# Altium PCB LED Controller.PcbDoc
Units mil, origin at the board's own origin, x right, y up, seen from the top; angles counter-clockwise.
Board outline 1800 x 1050 mil, 2 copper layers (Top Layer, Bottom Layer), stack 62.8 mil thick; 21 components, 12 nets, 58 pads, 18 vias.
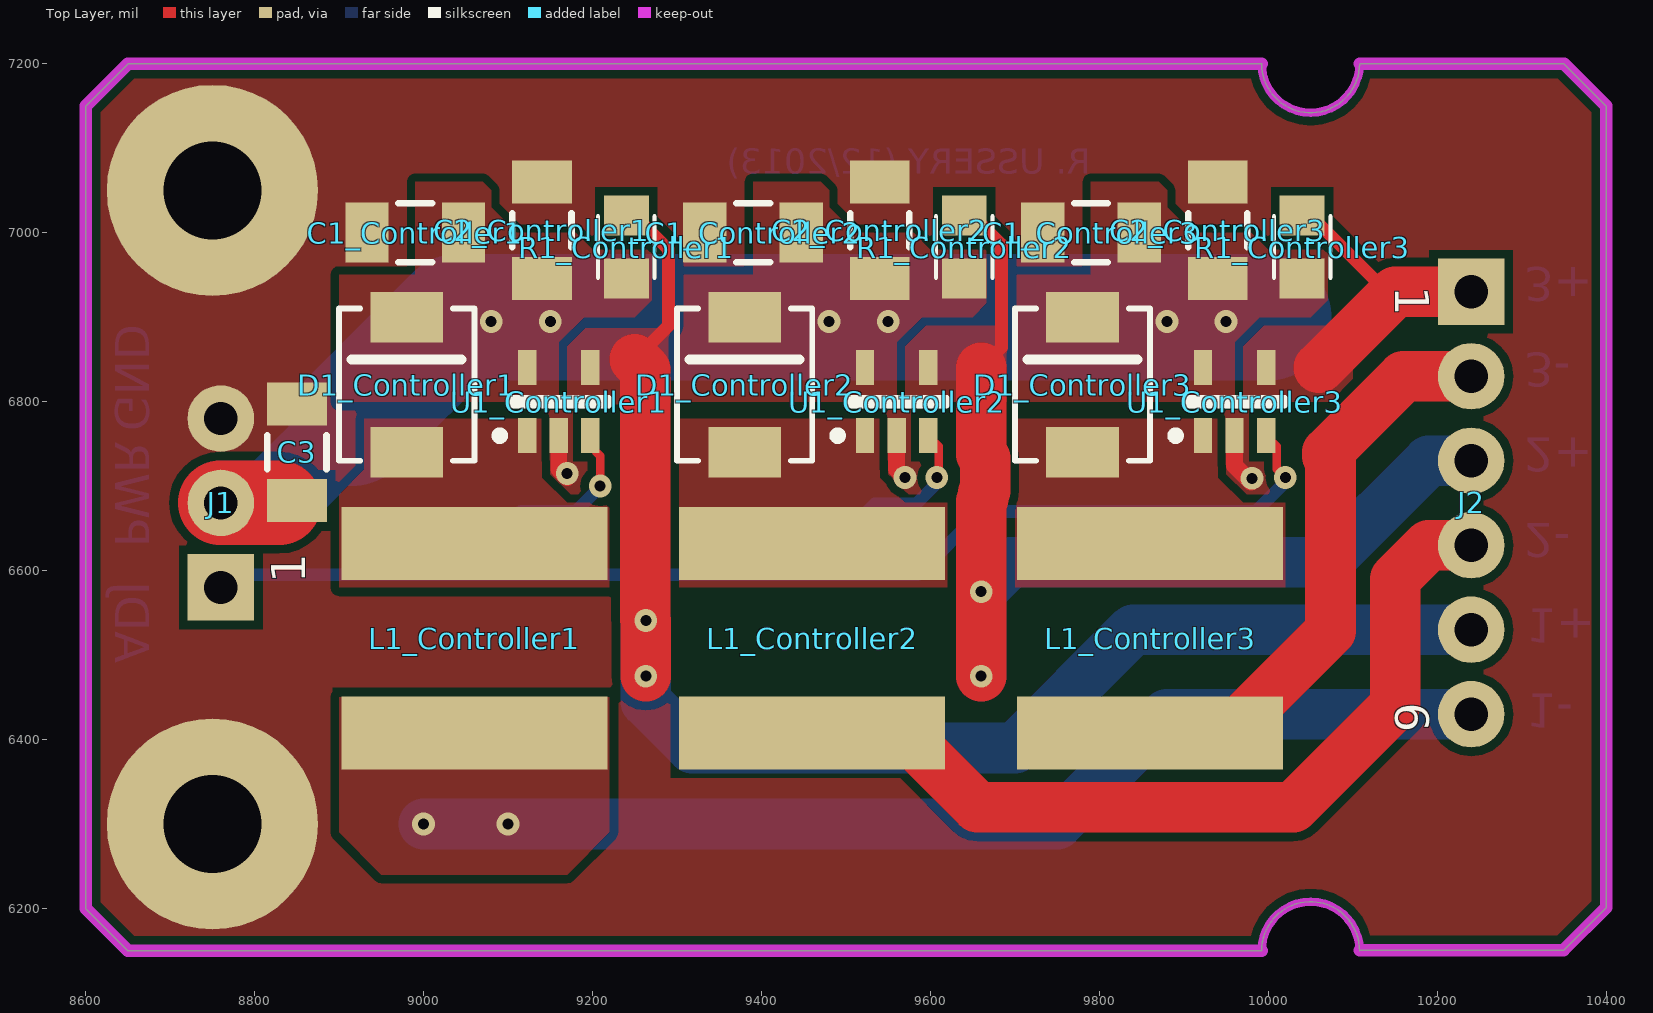
[diagram p0: Top Layer view]
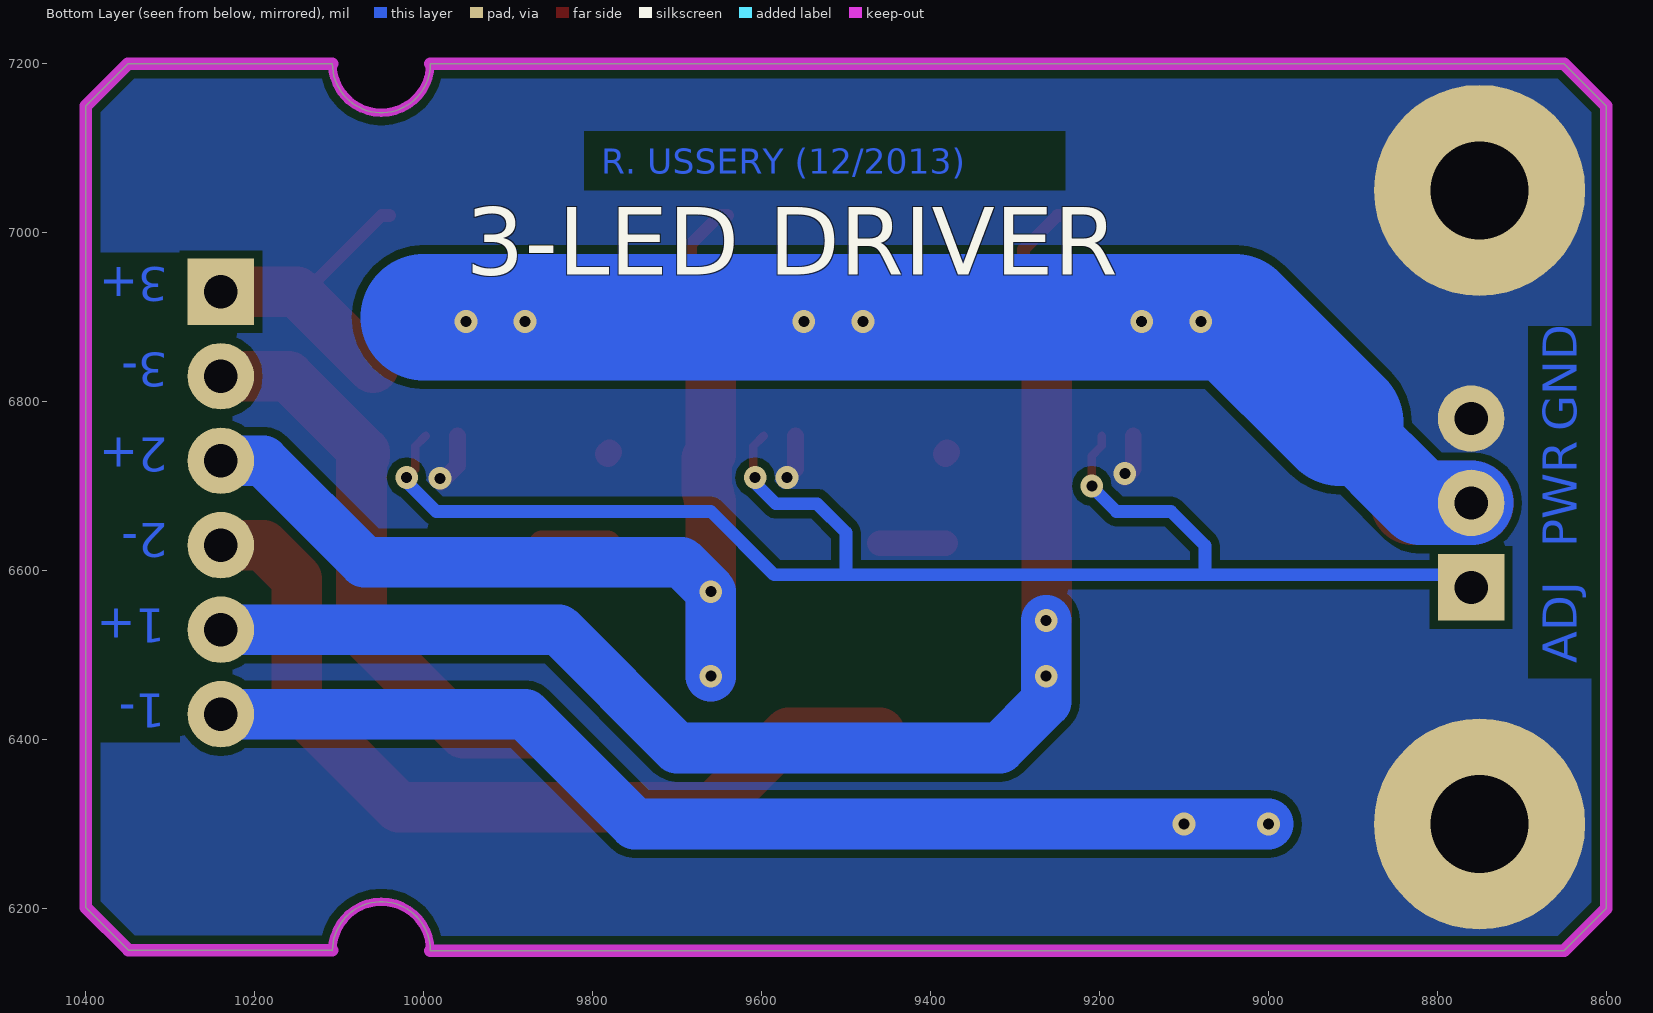
[diagram p1: Bottom Layer view, seen from below]
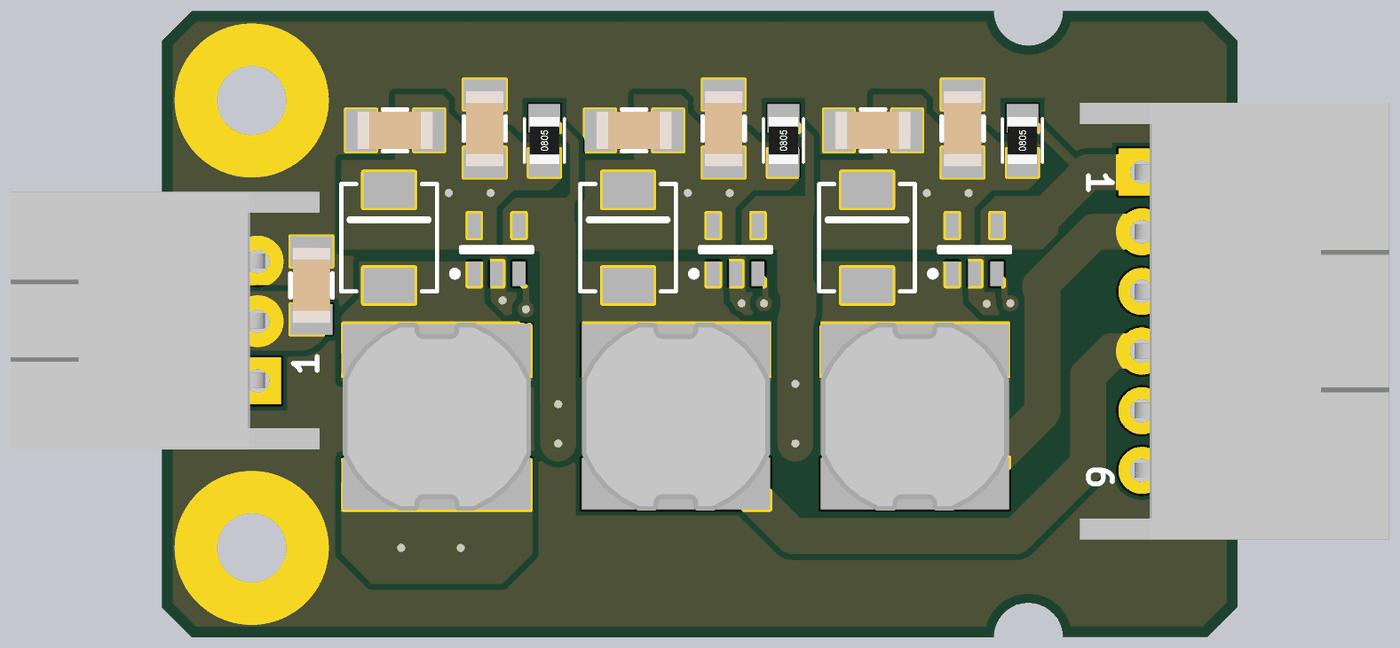
[diagram p2: 3D render of the assembled board from above, using the file's embedded part models]

## Layer stack, top to bottom
Top Layer: signal copper 1.4
Dielectric: core 60, FR-4, Dk 4.8
Bottom Layer: signal copper 1.4

## Board outline
8600,6200 8600,7150 8650,7200 9992,7200 ccw(c10050,7200) 10108,7200 10350,7200 10400,7150 10400,6201.25 10349.38,6150.62 10108,6150.62 10108,6150 ccw(c10050,6150) 9992,6150 8650,6150

## Design rules (kind name [scope] priority, off if disabled: settings)
AcuteAngle [All] p1: minimum=6.00000000000000E+0001 checktracksonly=FALSE
Clearance Clearance_1 [All] p1: gap=10
Clearance [All vs OnLayer('Mechanical 2')] p2: gap=15
HoleSize [All] p1: absolutevalues=TRUE maxlimit=200 minlimit=13 maxpercent=80.000 minpercent=20.000
MinimumAnnularRing [All] p1: minimumring=7
MinimumSolderMaskSliver [All] p1: minsoldermaskwidth=6
PolygonConnect [All] p1: connectstyle=Direct reliefconductorwidth=10 reliefentries=4 polygonreliefangle="90 Angle" airgapwidth=10
RoomDefinition Controller3 [InComponentClass('Controller3')] p1: confinementstyle=ConfineIn formatcopy=TRUE lockcomponents=FALSE outline 9680,7102.91 9680,6300 10100,6300 10100,7102.91
RoomDefinition Controller2 [InComponentClass('Controller2')] p2: confinementstyle=ConfineIn formatcopy=TRUE lockcomponents=FALSE outline 9280,7102.91 9280,6300 9700,6300 9700,7102.91
RoomDefinition Controller1 [InComponentClass('Controller1')] p3: confinementstyle=ConfineIn formatcopy=TRUE lockcomponents=FALSE outline 8880,7102.91 8880,6300 9300,6300 9300,7102.91
RoutingVias [All] p1: holewidth=28 width=50 viastyle="Through Hole" minholewidth=28 minwidth=50 maxholewidth=28 maxwidth=50
SilkToSolderMaskClearance [IsPad] p1: minsilkscreentomaskgap=4 clearancetoexposedcopper=TRUE
SolderMaskExpansion SolderMaskExpansion_Text [IsText] p1: expansion=4
SolderMaskExpansion SolderMaskExpansion_1 [All] p2: expansion=4
Width [All] p1: maxlimit=200 minlimit=10 preferedwidth=10
25 further rules are at their usual default settings.

## Classes and differential pairs
component class Controller1: C1_Controller1 C2_Controller1 D1_Controller1 L1_Controller1 R1_Controller1 U1_Controller1
component class Controller2: C1_Controller2 C2_Controller2 D1_Controller2 L1_Controller2 R1_Controller2 U1_Controller2
component class Controller3: C1_Controller3 C2_Controller3 D1_Controller3 L1_Controller3 R1_Controller3 U1_Controller3
component class "Top Level": C3 J2
channel class Controller: Controller1 Controller2 Controller3
net class ADJ[1..4]: ADJ3 ADJ4
net class LED_PWR[1..3]: LED_PWR1 LED_PWR2 LED_PWR3
net class LED_RTN[1..3]: LED_RTN1 LED_RTN2 LED_RTN3

## Components (designator, comment, footprint, x,y, rotation, side; value= is the part's Value field where it differs from the comment)
C1_Controller1 "4.7µF" CAP_1206 8990,7000 r180 top (schematic designator C1)
C1_Controller2 "4.7µF" CAP_1206 9390,7000 r180 top (schematic designator C1)
C1_Controller3 "4.7µF" CAP_1206 9790,7000 r180 top (schematic designator C1)
C2_Controller1 "4.7µF" CAP_1206 9140,7002.91 r90 top (schematic designator C2)
C2_Controller2 "4.7µF" CAP_1206 9540,7002.91 r90 top (schematic designator C2)
C2_Controller3 "4.7µF" CAP_1206 9940,7002.91 r90 top (schematic designator C2)
C3 "4.7µF" CAP_1206 8850,6740 r90 top
D1_Controller1 "DIODE" DO-214AA(SMB) 8980,6820 r270 top (schematic designator D1)
D1_Controller2 "DIODE" DO-214AA(SMB) 9380,6820 r270 top (schematic designator D1)
D1_Controller3 "DIODE" DO-214AA(SMB) 9780,6820 r270 top (schematic designator D1)
J1 "HEADER_3" MOLEX_C-GRID3_3PIN 8760,6680 r90 top
J2 "HEADER_6" MOLEX_C-GRID3_6PIN 10240,6680 r270 top
L1_Controller1 "47µH" INDUCTOR_BOURNS_SRN8040 9060,6520 r270 top (schematic designator L1)
L1_Controller2 "47µH" INDUCTOR_BOURNS_SRN8040 9460,6520 r270 top (schematic designator L1)
L1_Controller3 "47µH" INDUCTOR_BOURNS_SRN8040 9860,6520 r270 top (schematic designator L1)
R1_Controller1 "0.3" RES_0805 9240,6982.91 r90 top (schematic designator R1)
R1_Controller2 "0.3" RES_0805 9640,6982.91 r90 top (schematic designator R1)
R1_Controller3 "0.3" RES_0805 10040,6982.91 r90 top (schematic designator R1)
U1_Controller1 "ZXLD1360" SOT95P245X110-5N 9160,6800 r90 top (schematic designator U1)
U1_Controller2 "ZXLD1360" SOT95P245X110-5N 9560,6800 r90 top (schematic designator U1)
U1_Controller3 "ZXLD1360" SOT95P245X110-5N 9960,6800 r90 top (schematic designator U1)

## Footprints (in the part's own frame and the unit in brackets; to place one, negate y for a bottom-side part, rotate by r counter-clockwise, add the part's x,y. Pads: shape width x height; smd on the part's side, far side on the other; paste and mask are expansions set on the pad)
CAP_1206 [mm]
  rect 1.3x1.8 smd mask+0.076: 1(-1.45,0) 2(1.45,0)
  silkscreen extent -0.51,-0.89 0.51,0.89, body extent -1.6,-0.8 1.6,0.8, height 0.77
DO-214AA(SMB) [mil]
  rect 60x86 smd: 1(-80,0) 2(80,0)
  silkscreen extent -90,-80 90,80, body extent -90,-80 90,80, height 33
INDUCTOR_BOURNS_SRN8040 [mm] "INDUCTOR, BOURNES, MODEL SRN8040"
  rect 2.2x8 smd: 1(-2.85,0) 2(2.85,0)
  body extent -4,-4 4,4, height 4.02
MOLEX_C-GRID3_3PIN [mm]
  rect 2x2 hole 1: 1(-2.54,0)
  round 2 hole 1: 2(0,0) 3(2.54,0)
  body extent -5.46,-2.64 5.51,10.5, height 7.23
MOLEX_C-GRID3_6PIN [mm]
  rect 2x2 hole 1: 1(-6.35,0)
  round 2 hole 1: 2(-3.81,0) 3(-1.27,0) 4(1.27,0) 5(3.81,0) 6(6.35,0)
  body extent -9.3,-2.64 9.29,10.5, height 7.23
RES_0805 [mm]
  rect 1.2x1.35 smd mask+0.076: 1(-0.95,0) 2(0.95,0)
  silkscreen extent -0.92,-0.85 0.92,0.85, body extent -1,-0.62 1,0.63, height 0.58
SOT95P245X110-5N [mm]
  rect 1.05x0.55 smd: 1(-1.025,0.95) 2(-1.025,0) 3(-1.025,-0.95) 4(1.025,-0.95) 5(1.025,0.95)
  silkscreen extent -1.15,-1.5 0.1,1.9, body extent -0.7,-1.5 0.7,1.5, height 1.1

## Part data
C1_Controller1 C1_Controller2 C1_Controller3 C2_Controller1 C2_Controller2 C2_Controller3 C3: library part CAPACITOR, "Capacitor"
L1_Controller1 L1_Controller2 L1_Controller3: library part INDUCTOR
R1_Controller1 R1_Controller2 R1_Controller3: library part RESISTOR, "Resistor"

## Free pads (board coordinates)
  round 250 hole 116: 3(8750,7050) 4(8750,6300)

## Via types
v1: diameter 27, hole 13, Top Layer to Bottom Layer, tented both sides, 18 vias

## Nets (pads, with @x,y where several pads share a name; then routed paths per layer and width w, separated by ;. In a path a pad name is that pad's centre, name@x,y a point inside that pad or via, vN(x,y) a via of type N, cw(c..) or ccw(c..) an arc to the next point about the centre after c; other vN are vias at no path point)
ADJ3: J1.1 U1_Controller1.3 U1_Controller2.3 U1_Controller3.3 | length 1877.2
  Top Layer w10: U1_Controller1.3 9197.4,6747.6 9209.02,6735.98 v1(9209.02,6700) ; U1_Controller2.3 9610,6747.05 9610,6710 v1(9607.52,6710) ; U1_Controller3.3 10010,6747.05 10010,6720 v1(10020,6710)
  Bottom Layer w15: J1.1@8765,6595 9075,6595 ; v1(9209.02,6700) v1@9210,6700.98 ; v1@9210,6700 9180,6670 9115.23,6670 9075,6629.77 9075,6595 ; v1@9610,6710 v1(9607.52,6710) 9607.52,6703.68 9582.84,6679 9534,6679 9500,6645 9500,6595 ; v1(10020,6710) 10020,6705 9985,6670 9660,6670 9585,6595 9500,6595 ; 9075,6595 9500,6595
GND: C1_Controller1.2 C1_Controller2.2 C1_Controller3.2 C2_Controller1.2 C2_Controller2.2 C2_Controller3.2 C3.2 J1.3 pad.3 pad.4 U1_Controller1.2 U1_Controller2.2 U1_Controller3.2 | length 181.1
  Top Layer w20: U1_Controller1.2 9160,6720 9170,6710 v1(9170,6715) ; U1_Controller2.2 9560,6720 v1(9570,6710) ; U1_Controller3.2 9960,6724.31 9979.31,6705 9981.79,6707.47 9981.79,6707.91 v1(9980.43,6709.27)
LED_PWR1: J2.5 R1_Controller1.2 U1_Controller1.4 | length 1734.6
  Top Layer w15: R1_Controller1.2 9249.68,7020.32 9289.82,6980.18 9289.82,6889.82 9250,6850
  Top Layer w60: 9250,6850 9262.5,6837.5 ; 9262.52,6825 9262.52,6542.52 v1(9263,6541) v1(9263,6475)
  Bottom Layer w60: v1(9263,6541) 9263,6445 9318,6390 9700,6390 9840,6530 J2.5
LED_PWR2: J2.3 R1_Controller2.2 U1_Controller2.4 | length 1327.6
  Top Layer w15: R1_Controller2.2 9649.68,7020.32 9684.07,6985.93 9684.07,6864.07 9660,6840
  Top Layer w60: v1(9660,6475) v1(9660,6575) 9660,6682.22 9662.52,6684.74 9662.52,6692.08 9665,6694.56 9665,6732.78 9660,6737.78 9660,6840
  Bottom Layer w60: v1(9660,6475) v1(9660,6575) 9695,6610 10070,6610 10190,6730 J2.3
LED_PWR3: J2.1 R1_Controller3.2 U1_Controller3.4 | length 323.5
  Top Layer w15: R1_Controller3.2 10049.68,7020.32 10125,6945
  Top Layer w60: 10060,6840 10150,6930 J2.1@10230,6930
LED_RTN1: J2.6 L1_Controller1.2 | length 1293.8
  Bottom Layer w60: v1(9000,6300) 9750,6300 9880,6430 J2.6
  other v1: 9100,6300
LED_RTN2: J2.4 L1_Controller2.2 | length 1032.4
  Top Layer w60: L1_Controller2.2 9567.8,6407.8 9655.59,6320 10029.56,6320 10150,6440.44 10150,6590 10190,6630 J2.4
LED_RTN3: J2.2 L1_Controller3.2 | length 683.7
  Top Layer w60: L1_Controller3.2 9952.8,6407.8 10073.5,6528.5 10073.5,6732.16 10070,6735.66 10070,6740 10160,6830 J2.2
NetD1_Controller1_2: D1_Controller1.2 L1_Controller1.1 U1_Controller1.1
NetD1_Controller2_2: D1_Controller2.2 L1_Controller2.1 U1_Controller2.1 | length 80.9
  Top Layer w30: D1_Controller2.2 D1_Controller2.2@9382.2,6737.8 ; L1_Controller2.1@9382.2,6632.2 L1_Controller2.1
NetD1_Controller3_2: D1_Controller3.2 L1_Controller3.1 U1_Controller3.1 | length 80.9
  Top Layer w30: D1_Controller3.2 D1_Controller3.2@9782.2,6737.8 ; L1_Controller3.1@9782.2,6632.2 L1_Controller3.1
VIN: C1_Controller1.1 C1_Controller2.1 C1_Controller3.1 C2_Controller1.1 C2_Controller2.1 C2_Controller3.1 C3.1 D1_Controller1.1 D1_Controller2.1 D1_Controller3.1 J1.2 R1_Controller1.1 R1_Controller2.1 R1_Controller3.1 U1_Controller1.5 U1_Controller2.5 U1_Controller3.5 | length 1401.1
  Top Layer w100: J1.2@8759,6680.5 C3.1@8829,6680.5
  Bottom Layer w100: J1.2 8820,6680 8915,6775
  Bottom Layer w150: 8915,6775 9040,6900 10000,6900
  other v1: 9080,6895 9150,6895 9480,6895 9550,6895 9880,6895 9950,6895

## Polygon pours and split planes (outlines as drawn)
GND on Top Layer "GND" (solid, pour order 23): 9700,6950 9700.83,6950.83 9790,6950.83 9790,7060 9870,7060 9880,7050 9880,7030 9910,7000 10000,7000 10000,7060 10100,7060 10100,7102.91 9700,7102.91
LED_PWR3 on Top Layer "Top Layer-LED_PWR3" (solid, pour order 29): 9970,6800 9970,6870 9990,6890 10100,6890 10100,6800
VIN on Top Layer "VIN" (solid, pour order 20): 9960,6800 9960,6870 9990,6900 10050,6900 10070,6920 10070,6980 10000,6980 9980,7000 9910,7000 9880,7030 9880,7050 9870,7060 9790,7060 9790,6950 9700,6950 9700,6800
NetD1_Controller3_2 on Top Layer "Top Layer-NetD1_Controller3_2" (solid, pour order 26): 9700,6580 9700,6780 9940,6780 9940,6710 9970,6680 10020,6680 10020,6580
NetD1_Controller2_2 on Top Layer "Top Layer-NetD1_Controller3_2" (solid, pour order 25): 9300,6580 9300,6780 9540,6780 9540,6710 9570,6680 9620,6680 9620,6580
VIN on Top Layer "VIN" (solid, pour order 19): 9560,6800 9560,6870 9590,6900 9650,6900 9670,6920 9670,6980 9600,6980 9580,7000 9510,7000 9480,7030 9480,7050 9470,7060 9390,7060 9390,6950 9300,6950 9300,6800
LED_PWR2 on Top Layer "Top Layer-LED_PWR3" (solid, pour order 28): 9570,6800 9570,6870 9590,6890 9700,6890 9700,6800
GND on Top Layer "GND" (solid, pour order 22): 9300,6950 9300.83,6950.83 9390,6950.83 9390,7060 9470,7060 9480,7050 9480,7030 9510,7000 9600,7000 9600,7060 9700,7060 9700,7102.91 9300,7102.91
VIN on Top Layer "VIN" (solid, pour order 18): 9160,6800 9160,6870 9190,6900 9250,6900 9270,6920 9270,6980 9200,6980 9180,7000 9110,7000 9080,7030 9080,7050 9070,7060 8990,7060 8990,6950 8900,6950 8900,6800
LED_PWR1 on Top Layer "Top Layer-LED_PWR3" (solid, pour order 27): 9170,6797.09 9170,6867.09 9190,6887.09 9300,6887.09 9300,6797.09
GND on Top Layer "GND" (solid, pour order 21): 8900,6950 8900.83,6950.83 8990,6950.83 8990,7060 9070,7060 9080,7050 9080,7030 9110,7000 9200,7000 9200,7060 9300,7060 9300,7102.91 8900,7102.91
LED_RTN1 on Top Layer "Top Layer-LED_RTN1" (solid, pour order 30): 8900,6450 9220,6450 9220,6290 9170,6240 8950,6240 8900,6290
NetD1_Controller1_2 on Top Layer "Top Layer-NetD1_Controller3_2" (solid, pour order 24): 8900,6580 8900,6690 8930,6720 8930,6780 9140,6780 9140,6710 9170,6680 9220,6680 9220,6580
GND on Top Layer "GND" (solid, remove dead copper, pour order 32): 8600,7150 8650,7200 10450,7200 10500,7150 10500,6200 10450,6150 8650,6150 8600,6200
GND on Bottom Layer "GND" (solid, remove dead copper, pour order 31): 8600,7150 8650,7200 10450,7200 10500,7150 10500,6200 10450,6150 8650,6150 8600,6200
no net on Bottom Solder "GND" (solid): 8685,6480 8600,6480 8600,6885 8685,6885
no net on Bottom Solder "GND" (solid): 10380,6405 10295,6405 10295,6970 10380,6970

## Keep-outs
Keep-Out Layer:
  lines w10: 9992,6150 cw(c10050,6150) 10108,6150 ; 9992,7200 ccw(c10050,7200) 10108,7200
  lines w15: 9992,6150 8650,6150 8600,6200 8600,7150 8650,7200 8655,7200 9992,7200 ; 10108,6150.62 10349.38,6150.62 10400,6201.25 10400,7150 10350,7200 10108,7200

## Other copper
Bottom Layer:
  text "R. USSERY (12/2013)" at 9790,7070 h30
  text "3+" at 10302.67,6959 h40 r180
  text "3-" at 10302.67,6858 h40 r180
  text "GND" at 8635,6765 h40 r270
  text "2+" at 10302.67,6757 h40 r180
  text "2-" at 10302.67,6656 h40 r180
  text "PWR" at 8635,6627.5 h40 r270
  text "1+" at 10306,6555 h40 r180
  text "ADJ" at 8635,6490 h40 r270
  text "1-" at 10306,6454 h40 r180

## Silkscreen, mask and mechanical layers (free items; w line width, h text height)
Top Overlay:
  text "1" at 8860,6585 h40 r90
Bottom Overlay:
  text "3-LED DRIVER" at 9950,6950 h80

## Text inside footprints (layer, text, board x,y; h text height)
J2: Top Overlay "1" at 10150,6936.66 h40 r270; Top Overlay "6" at 10150,6443.33 h40 r270